# EAGLE board 7seg (EAGLE 9.1.2)
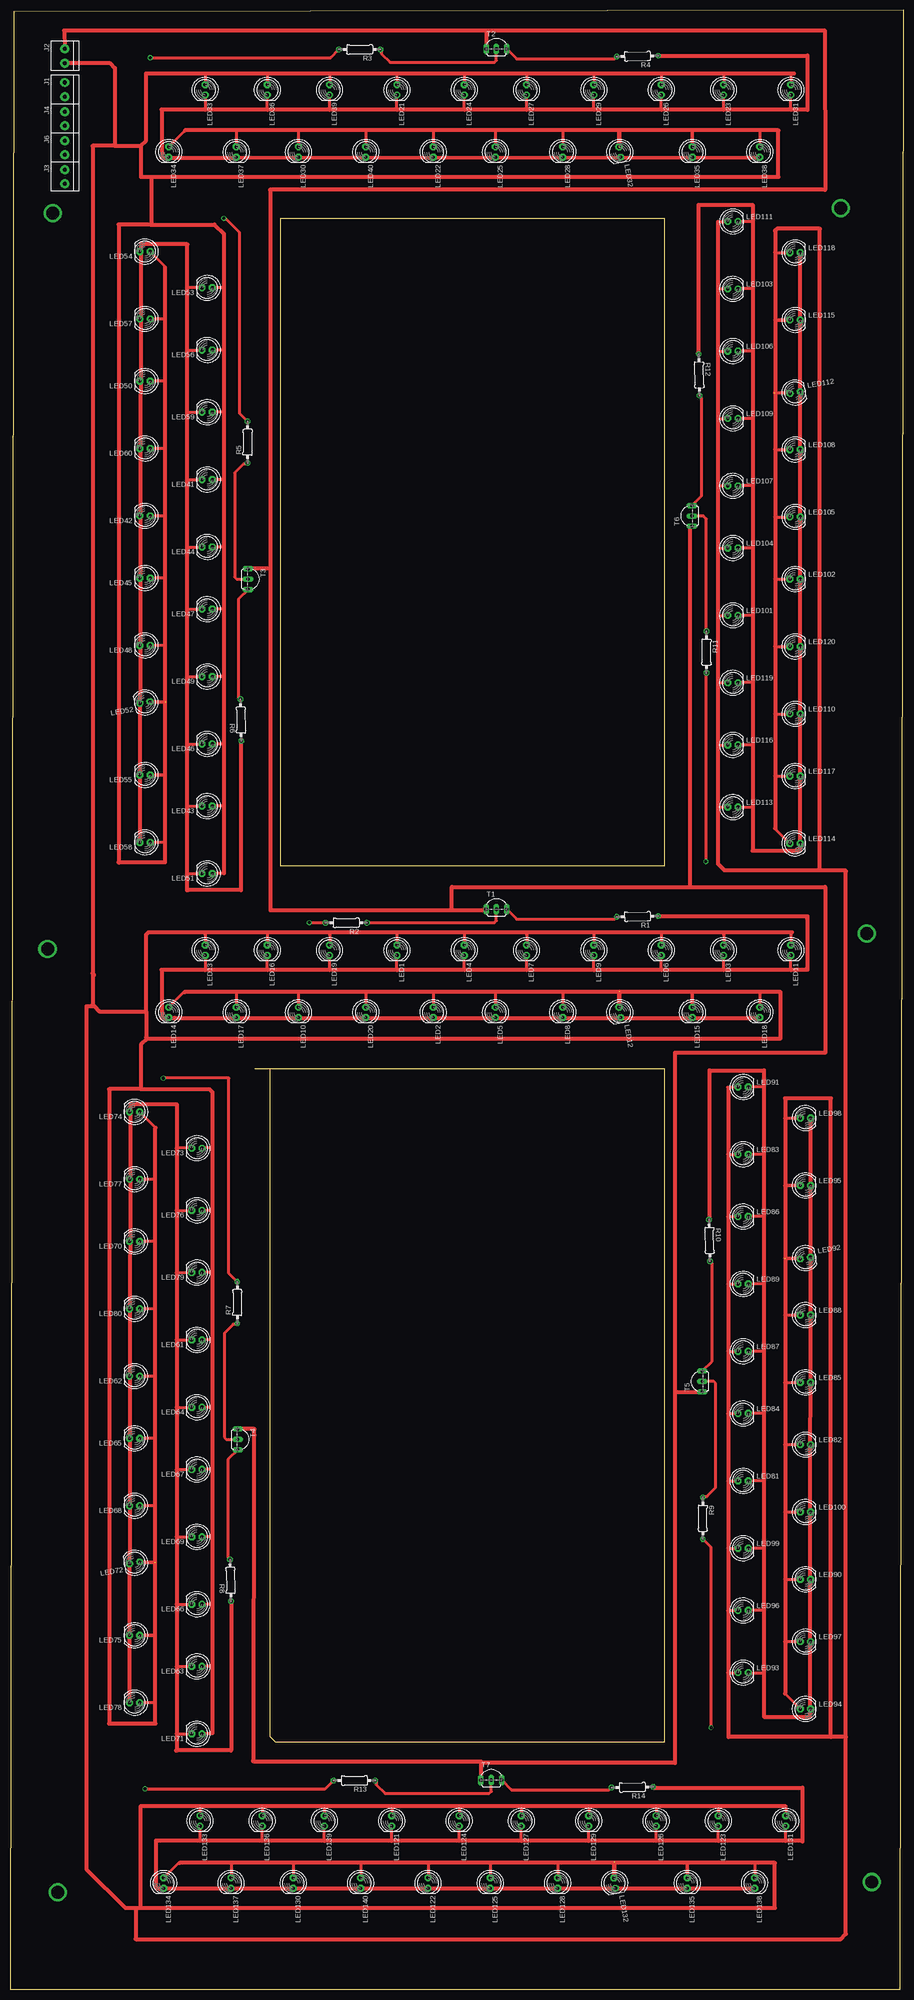
[diagram p0: board, top side]
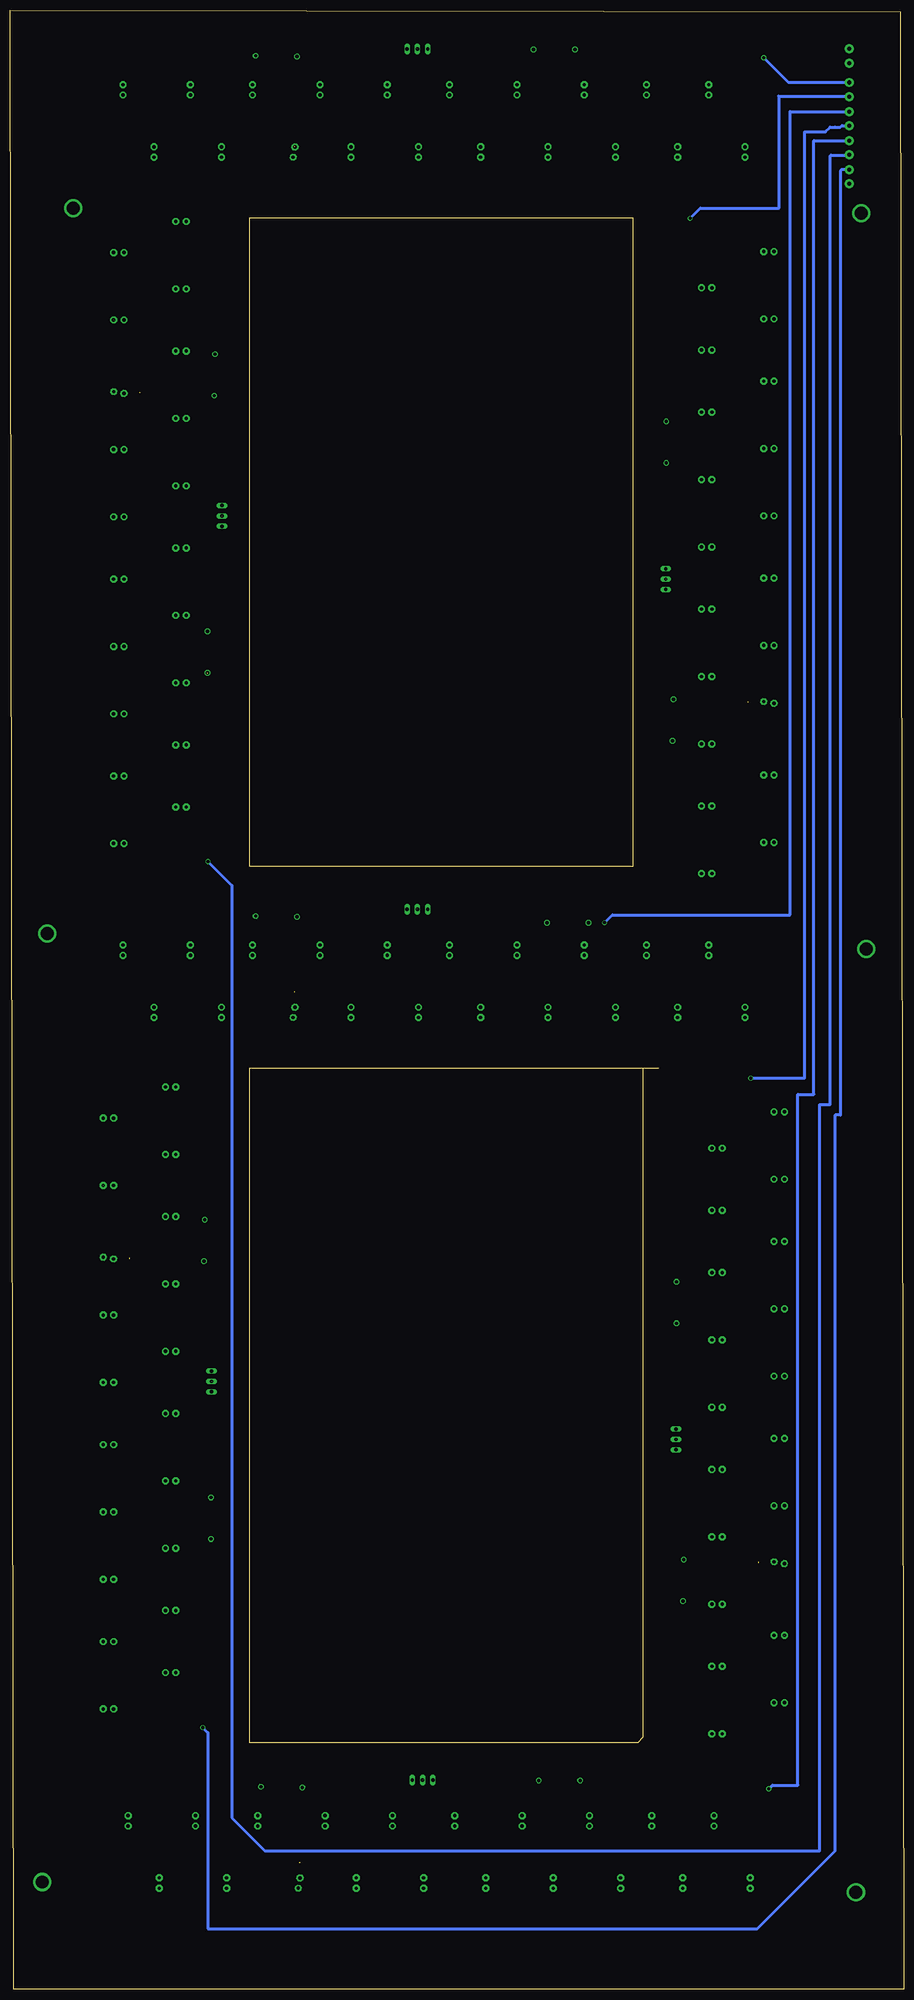
[diagram p1: board, bottom side, seen from below]

Size 218.88 x 484.98 mm. Coordinates in mm from the lower left corner, seen from the top.
Outline: 59.94,225.68 63.75,225.68
Outline: 63.75,225.68 160.27,225.68 160.27,60.58 65.02,60.58 63.75,61.85 63.75,225.68
Outline: 0,0 218,0.04 218.88,484.98 0.89,484.56 0,0
Outline: 66.29,433.96 160.27,433.96 160.27,275.21 66.29,275.21 66.29,433.96
Copper layers (1*16): Top 0.035mm / dielectric 1.5mm / Bottom 0.035mm
Design rules "default": minimum track width 6mil, minimum drill 0.35mm, track to track 6mil, track to pad 6mil, pad to pad 6mil, via to via 6mil, smd to smd 6mil, copper to edge 40mil, drill to drill 6mil, minimum pad ring 10mil, minimum via ring 8mil, stop-mask expansion 4mil, vias tented up to drill 0mil, thermal gap 10mil
Net classes: 0 default: width 0.762 mm, drill 0.762 mm, clearance 0.635 mm; 1 power: width 1.016 mm, drill 0.762 mm, clearance 0.762 mm

## Footprints (pad centres in the part's own frame; a part is rotated, then mirrored left to right if it is on the bottom)
1X2-3.5MM = drill 1 pad 2.184: 1 1.8,0; 2 -1.7,0
LED5MM = drill 0.813 pad 1.676 octagon: A -1.27,0; K 1.27,0
BEAGLEBONEBLACK_MOUNTING_HOLE = drill 3.175 pad 4.445: P$1 0,0
0207/10 = drill 0.813 octagon: 1 -5.08,0; 2 5.08,0
TO92-EBC-OVAL = drill 0.813 long: B 0,-1.27; C 2.54,-1.27; E -2.54,-1.27

## Placement (x,y rotation side)
J1  1X2-3.5MM  [1X2-3.5MM]  13.34,465.46 90 top
J2  1X2-3.5MM  [1X2-3.5MM]  13.34,473.71 90 top
J3  1X2-3.5MM  [1X2-3.5MM]  13.34,444.12 90 top
J4  1X2-3.5MM  [1X2-3.5MM]  13.34,458.34 90 top
J6  1X2-3.5MM  [1X2-3.5MM]  13.34,451.23 90 top
LED1  [LED5MM]  94.74,254.63 270 top
LED2  [LED5MM]  103.63,239.4 270 top
LED3  [LED5MM]  174.75,254.63 270 top
LED4  [LED5MM]  111.25,254.63 270 top
LED5  [LED5MM]  118.87,239.4 270 top
LED6  [LED5MM]  159.51,254.63 270 top
LED7  [LED5MM]  126.49,254.63 270 top
LED8  [LED5MM]  135.38,239.4 270 top
LED9  [LED5MM]  143,254.63 270 top
LED10  [LED5MM]  70.61,239.4 270 top
LED11  [LED5MM]  191.26,254.63 270 top
LED12  [LED5MM]  149.35,239.4 279.7 top
LED13  [LED5MM]  47.75,254.63 270 top
LED14  [LED5MM]  38.86,239.4 270 top
LED15  [LED5MM]  167.13,239.4 270 top
LED16  [LED5MM]  62.99,254.63 270 top
LED17  [LED5MM]  55.37,239.4 270 top
LED18  [LED5MM]  183.64,239.4 270 top
LED19  [LED5MM]  78.23,254.63 270 top
LED20  [LED5MM]  87.12,239.4 270 top
LED21  [LED5MM]  94.74,465.46 270 top
LED22  [LED5MM]  103.63,450.22 270 top
LED23  [LED5MM]  174.75,465.46 270 top
LED24  [LED5MM]  111.25,465.46 270 top
LED25  [LED5MM]  118.87,450.22 270 top
LED26  [LED5MM]  159.51,465.46 270 top
LED27  [LED5MM]  126.49,465.46 270 top
LED28  [LED5MM]  135.38,450.22 270 top
LED29  [LED5MM]  143,465.46 270 top
LED30  [LED5MM]  70.61,450.22 270 top
LED31  [LED5MM]  191.26,465.46 270 top
LED32  [LED5MM]  149.35,450.22 279.7 top
LED33  [LED5MM]  47.75,465.46 270 top
LED34  [LED5MM]  38.86,450.22 270 top
LED35  [LED5MM]  167.13,450.22 270 top
LED36  [LED5MM]  62.99,465.46 270 top
LED37  [LED5MM]  55.37,450.22 270 top
LED38  [LED5MM]  183.64,450.22 270 top
LED39  [LED5MM]  78.23,465.46 270 top
LED40  [LED5MM]  87.12,450.22 270 top
LED41  [LED5MM]  48.26,369.95 180 top
LED42  [LED5MM]  33.02,361.06 180 top
LED43  [LED5MM]  48.26,289.94 180 top
LED44  [LED5MM]  48.26,353.44 180 top
LED45  [LED5MM]  33.02,345.82 180 top
LED46  [LED5MM]  48.26,305.18 180 top
LED47  [LED5MM]  48.26,338.2 180 top
LED48  [LED5MM]  33.02,329.31 180 top
LED49  [LED5MM]  48.26,321.69 180 top
LED50  [LED5MM]  33.02,394.08 180 top
LED51  [LED5MM]  48.26,273.43 180 top
LED52  [LED5MM]  33.02,315.34 189.7 top
LED53  [LED5MM]  48.26,416.94 180 top
LED54  [LED5MM]  33.02,425.83 180 top
LED55  [LED5MM]  33.02,297.56 180 top
LED56  [LED5MM]  48.26,401.7 180 top
LED57  [LED5MM]  33.02,409.32 180 top
LED58  [LED5MM]  33.02,281.05 180 top
LED59  [LED5MM]  48.26,386.46 180 top
LED60  [LED5MM]  33.02,377.57 180 top
LED61  [LED5MM]  45.72,159.13 180 top
LED62  [LED5MM]  30.48,150.24 180 top
LED63  [LED5MM]  45.72,79.12 180 top
LED64  [LED5MM]  45.72,142.62 180 top
LED65  [LED5MM]  30.48,135 180 top
LED66  [LED5MM]  45.72,94.36 180 top
LED67  [LED5MM]  45.72,127.38 180 top
LED68  [LED5MM]  30.48,118.49 180 top
LED69  [LED5MM]  45.72,110.87 180 top
LED70  [LED5MM]  30.48,183.26 180 top
LED71  [LED5MM]  45.72,62.61 180 top
LED72  [LED5MM]  30.48,104.52 189.7 top
LED73  [LED5MM]  45.72,206.12 180 top
LED74  [LED5MM]  30.48,215.01 180 top
LED75  [LED5MM]  30.48,86.74 180 top
LED76  [LED5MM]  45.72,190.88 180 top
LED77  [LED5MM]  30.48,198.5 180 top
LED78  [LED5MM]  30.48,70.23 180 top
LED79  [LED5MM]  45.72,175.64 180 top
LED80  [LED5MM]  30.48,166.75 180 top
LED81  [LED5MM]  179.58,124.59 0 top
LED82  [LED5MM]  194.82,133.48 0 top
LED83  [LED5MM]  179.58,204.6 0 top
LED84  [LED5MM]  179.58,141.1 0 top
LED85  [LED5MM]  194.82,148.72 0 top
LED86  [LED5MM]  179.58,189.36 0 top
LED87  [LED5MM]  179.58,156.34 0 top
LED88  [LED5MM]  194.82,165.23 0 top
LED89  [LED5MM]  179.58,172.85 0 top
LED90  [LED5MM]  194.82,100.46 0 top
LED91  [LED5MM]  179.58,221.11 0 top
LED92  [LED5MM]  194.82,179.2 9.7 top
LED93  [LED5MM]  179.58,77.6 0 top
LED94  [LED5MM]  194.82,68.71 0 top
LED95  [LED5MM]  194.82,196.98 0 top
LED96  [LED5MM]  179.58,92.84 0 top
LED97  [LED5MM]  194.82,85.22 0 top
LED98  [LED5MM]  194.82,213.49 0 top
LED99  [LED5MM]  179.58,108.08 0 top
LED100  [LED5MM]  194.82,116.97 0 top
LED101  [LED5MM]  177.04,336.68 0 top
LED102  [LED5MM]  192.28,345.57 0 top
LED103  [LED5MM]  177.04,416.69 0 top
LED104  [LED5MM]  177.04,353.19 0 top
LED105  [LED5MM]  192.28,360.81 0 top
LED106  [LED5MM]  177.04,401.45 0 top
LED107  [LED5MM]  177.04,368.43 0 top
LED108  [LED5MM]  192.28,377.32 0 top
LED109  [LED5MM]  177.04,384.94 0 top
LED110  [LED5MM]  192.28,312.55 0 top
LED111  [LED5MM]  177.04,433.2 0 top
LED112  [LED5MM]  192.28,391.29 9.7 top
LED113  [LED5MM]  177.04,289.69 0 top
LED114  [LED5MM]  192.28,280.8 0 top
LED115  [LED5MM]  192.28,409.07 0 top
LED116  [LED5MM]  177.04,304.93 0 top
LED117  [LED5MM]  192.28,297.31 0 top
LED118  [LED5MM]  192.28,425.58 0 top
LED119  [LED5MM]  177.04,320.17 0 top
LED120  [LED5MM]  192.28,329.06 0 top
LED121  [LED5MM]  93.47,41.27 270 top
LED122  [LED5MM]  102.36,26.04 270 top
LED123  [LED5MM]  173.48,41.27 270 top
LED124  [LED5MM]  109.98,41.27 270 top
LED125  [LED5MM]  117.6,26.04 270 top
LED126  [LED5MM]  158.24,41.27 270 top
LED127  [LED5MM]  125.22,41.27 270 top
LED128  [LED5MM]  134.11,26.04 270 top
LED129  [LED5MM]  141.73,41.27 270 top
LED130  [LED5MM]  69.34,26.04 270 top
LED131  [LED5MM]  189.99,41.27 270 top
LED132  [LED5MM]  148.08,26.04 279.7 top
LED133  [LED5MM]  46.48,41.27 270 top
LED134  [LED5MM]  37.59,26.04 270 top
LED135  [LED5MM]  165.86,26.04 270 top
LED136  [LED5MM]  61.72,41.27 270 top
LED137  [LED5MM]  54.1,26.04 270 top
LED138  [LED5MM]  182.37,26.04 270 top
LED139  [LED5MM]  76.96,41.27 270 top
LED140  [LED5MM]  85.85,26.04 270 top
MGT2  BEAGLEBONEBLACK_MOUNTING_HOLE  [BEAGLEBONEBLACK_MOUNTING_HOLE]  209.8,258.7 0 top
MGT3  BEAGLEBONEBLACK_MOUNTING_HOLE  [BEAGLEBONEBLACK_MOUNTING_HOLE]  10.41,435.23 0 top
MGT4  BEAGLEBONEBLACK_MOUNTING_HOLE  [BEAGLEBONEBLACK_MOUNTING_HOLE]  203.45,436.5 0 top
MGT6  BEAGLEBONEBLACK_MOUNTING_HOLE  [BEAGLEBONEBLACK_MOUNTING_HOLE]  9.14,254.89 0 top
MGT8  BEAGLEBONEBLACK_MOUNTING_HOLE  [BEAGLEBONEBLACK_MOUNTING_HOLE]  11.68,23.75 0 top
MGT9  BEAGLEBONEBLACK_MOUNTING_HOLE  [BEAGLEBONEBLACK_MOUNTING_HOLE]  211.07,26.29 0 top
R1  [0207/10]  153.67,262.89 181.2 top
R2  [0207/10]  82.3,261.37 180 top
R3  [0207/10]  85.6,475.36 180 top
R4  [0207/10]  153.67,473.71 181.2 top
R5  [0207/10]  58.17,379.1 90 top
R6  [0207/10]  56.52,311.02 91.2 top
R7  [0207/10]  55.63,168.28 90 top
R8  [0207/10]  53.98,100.2 91.2 top
R9  [0207/10]  169.67,115.44 270 top
R10  [0207/10]  171.32,183.51 271.2 top
R11  [0207/10]  170.56,327.66 270 top
R12  [0207/10]  168.78,395.61 271.2 top
R13  [0207/10]  84.33,51.18 180 top
R14  [0207/10]  152.4,49.53 181.2 top
T1  2N2222  [TO92-EBC-OVAL]  119.13,265.94 0 top
T2  2N2222  [TO92-EBC-OVAL]  119.13,476.76 0 top
T3  2N2222  [TO92-EBC-OVAL]  59.56,345.57 270 top
T4  2N2222  [TO92-EBC-OVAL]  57.02,134.75 270 top
T5  2N2222  [TO92-EBC-OVAL]  168.28,148.97 90 top
T6  2N2222  [TO92-EBC-OVAL]  165.74,361.06 90 top
T7  2N2222  [TO92-EBC-OVAL]  117.86,52.58 0 top

## Library data of the parts
J1-J4 J6 LED1-LED140 T1-T7 = adafruit
MGT2-MGT4 MGT6 MGT8 MGT9 = BeagleBone_Black_Wireless
R1-R14 = resistor

## Nets
N$2 [power]: LED17.A
N$3: R1.2 T1.C
N$4: R2.2
N$5: R2.1 T1.B
N$6: T1.E
N$8 [power]: LED34.A
N$9: R4.2 T2.C
N$10: R3.1 T2.B
N$12: R3.2
N$15 [power]: LED54.A
N$16: R6.2 T3.C
N$17: R5.1 T3.B
N$18 [power]: LED55.K
N$19: R5.2
N$22 [power]: LED74.A
N$23: R8.2 T4.C
N$24: R7.1 T4.B
N$25 [power]: LED75.K
N$26: R7.2
N$29 [power]: LED91.A
N$30: R10.2 T5.C
N$31: R9.1 T5.B
N$32 [power]: LED98.K
N$33: R9.2
N$36 [power]: LED111.A
N$37: R12.2 T6.C
N$38: R11.1 T6.B
N$39 [power]: LED118.K
N$40: R11.2
N$43 [power]: LED137.A
N$44: R14.2 T7.C
N$45: R13.1 T7.B
N$47: R13.2
S$1 [power]: LED93.A
S$9 [power]: R14.1
S$10 [power]: LED31.A
S$11 [power]: LED131.A
S$12 [power]: LED33.A
S$13 [power]: LED36.A
S$14 [power]: LED39.A
S$15 [power]: LED21.A
S$16 [power]: LED24.A
S$17 [power]: LED27.A
S$18 [power]: LED29.A
S$19 [power]: LED26.A
S$20 [power]: LED23.A
S$21 [power]: LED38.A
S$22 [power]: LED35.A
S$23 [power]: LED32.A
S$24 [power]: LED28.A
S$25 [power]: LED25.A
S$26 [power]: LED22.A
S$27 [power]: LED40.A
S$28 [power]: LED30.A
S$29 [power]: LED37.A
S$30 [power]: LED43.A
S$31 [power]: LED58.A
S$32 [power]: LED55.A
S$33 [power]: LED52.A
S$34 [power]: LED48.A
S$35 [power]: LED45.A
S$36 [power]: LED42.A
S$37 [power]: LED60.A
S$38 [power]: LED50.A
S$39 [power]: LED57.A
S$40 [power]: LED53.A
S$41 [power]: LED56.A
S$42 [power]: LED59.A
S$43 [power]: LED41.A
S$44 [power]: LED44.A
S$45 [power]: LED47.A
S$46 [power]: LED49.A
S$47 [power]: LED46.A
S$48 [power]: LED51.A
S$49 [power]: LED11.A
S$50 [power]: LED13.A
S$51 [power]: LED16.A
S$52 [power]: LED19.A
S$53 [power]: LED1.A
S$54 [power]: LED4.A
S$55 [power]: LED7.A
S$56 [power]: LED9.A
S$57 [power]: LED6.A
S$58 [power]: LED3.A
S$59 [power]: LED63.A
S$60 [power]: LED18.A
S$61 [power]: LED15.A
S$62 [power]: LED12.A
S$63 [power]: LED8.A
S$64 [power]: LED5.A
S$65 [power]: LED2.A
S$66 [power]: LED20.A
S$67 [power]: LED10.A
S$68 [power]: LED14.A
S$69 [power]: LED73.A
S$70 [power]: LED76.A
S$71 [power]: LED79.A
S$72 [power]: LED61.A
S$73 [power]: LED64.A
S$74 [power]: LED67.A
S$75 [power]: LED69.A
S$76 [power]: LED66.A
S$77 [power]: LED71.A
S$78 [power]: LED78.A
S$79 [power]: LED75.A
S$80 [power]: LED72.A
S$81 [power]: LED68.A
S$82 [power]: LED65.A
S$83 [power]: LED62.A
S$84 [power]: LED80.A
S$85 [power]: LED70.A
S$86 [power]: LED77.A
S$87 [power]: LED138.A
S$88 [power]: LED135.A
S$89 [power]: LED132.A
S$90 [power]: LED128.A
S$91 [power]: LED125.A
S$92 [power]: LED122.A
S$93 [power]: LED140.A
S$94 [power]: LED130.A
S$95 [power]: LED134.A
S$96 [power]: LED133.A
S$97 [power]: LED136.A
S$98 [power]: LED139.A
S$99 [power]: LED121.A
S$100 [power]: LED124.A
S$101 [power]: LED127.A
S$102 [power]: LED129.A
S$103 [power]: LED126.A
S$104 [power]: LED123.A
S$105 [power]: LED97.A
S$106 [power]: LED96.A
S$107 [power]: LED99.A
S$108 [power]: LED81.A
S$109 [power]: LED84.A
S$110 [power]: LED87.A
S$111 [power]: LED89.A
S$112 [power]: LED86.A
S$113 [power]: LED83.A
S$114 [power]: LED98.A
S$115 [power]: LED95.A
S$116 [power]: LED92.A
S$117 [power]: LED88.A
S$118 [power]: LED85.A
S$119 [power]: LED82.A
S$120 [power]: LED100.A
S$121 [power]: LED90.A
S$122 [power]: LED94.A
S$123 [power]: LED117.A
S$124 [power]: LED118.A
S$125 [power]: LED115.A
S$126 [power]: LED112.A
S$127 [power]: LED108.A
S$128 [power]: LED105.A
S$129 [power]: LED102.A
S$130 [power]: LED120.A
S$131 [power]: LED110.A
S$132 [power]: LED114.A
S$133 [power]: LED113.A
S$134 [power]: LED116.A
S$135 [power]: LED119.A
S$136 [power]: LED101.A
S$137 [power]: LED104.A
S$138 [power]: LED107.A
S$139 [power]: LED109.A
S$140 [power]: LED106.A
S$141 [power]: LED103.A
S$142 [power]: T6.E
S$143 [power]: LED31.K
S$144 [power]: LED23.K
S$145 [power]: LED26.K
S$146 [power]: LED29.K
S$147 [power]: LED27.K
S$148 [power]: LED24.K
S$149 [power]: LED21.K
S$150 [power]: LED39.K
S$151 [power]: LED36.K
S$152 [power]: LED33.K
S$153 [power]: LED32.K
S$154 [power]: LED35.K
S$155 [power]: LED51.K
S$156 [power]: LED43.K
S$157 [power]: LED46.K
S$158 [power]: LED49.K
S$159 [power]: LED47.K
S$160 [power]: LED44.K
S$161 [power]: LED41.K
S$162 [power]: LED59.K
S$163 [power]: LED56.K
S$164 [power]: LED53.K
S$165 [power]: LED11.K
S$166 [power]: LED52.K
S$167 [power]: LED3.K
S$168 [power]: LED6.K
S$169 [power]: LED9.K
S$170 [power]: LED7.K
S$171 [power]: LED4.K
S$172 [power]: LED1.K
S$173 [power]: LED19.K
S$174 [power]: LED16.K
S$175 [power]: LED13.K
S$176 [power]: LED12.K
S$177 [power]: LED15.K
S$178 [power]: LED71.K
S$179 [power]: LED63.K
S$180 [power]: LED66.K
S$181 [power]: LED69.K
S$182 [power]: LED67.K
S$183 [power]: LED64.K
S$184 [power]: LED61.K
S$185 [power]: LED79.K
S$186 [power]: LED76.K
S$187 [power]: LED73.K
S$188 [power]: LED72.K
S$189 [power]: R10.1
S$190 [power]: LED131.K
S$191 [power]: LED123.K
S$192 [power]: LED126.K
S$193 [power]: LED129.K
S$194 [power]: LED127.K
S$195 [power]: LED124.K
S$196 [power]: LED121.K
S$197 [power]: LED139.K
S$198 [power]: LED136.K
S$199 [power]: LED133.K
S$200 [power]: LED132.K
S$201 [power]: LED135.K
S$202 [power]: R12.1
S$203 [power]: LED91.K
S$204 [power]: LED83.K
S$205 [power]: LED86.K
S$206 [power]: LED89.K
S$207 [power]: LED87.K
S$208 [power]: LED84.K
S$209 [power]: LED81.K
S$210 [power]: LED99.K
S$211 [power]: LED96.K
S$212 [power]: LED93.K
S$213 [power]: LED92.K
S$214 [power]: LED95.K
S$216 [power]: LED111.K
S$217 [power]: LED103.K
S$218 [power]: LED106.K
S$219 [power]: LED109.K
S$220 [power]: LED107.K
S$221 [power]: LED104.K
S$222 [power]: LED101.K
S$223 [power]: LED119.K
S$224 [power]: LED116.K
S$225 [power]: LED113.K
S$227 [power]: LED112.K
S$228 [power]: LED115.K

## Tracks (layer width: path | path; a pad name or v marks a point on that pad's centre or on a via)
GND
  Top 1.016: 13.34,475.62 13.21,480.06 115.82,480.06 | 115.82,480.06 116.59,480.06 116.59,475.49 | 115.82,480.06 199.52,480.06 199.64,440.94 63.75,440.94 | 63.75,440.94 63.63,440.94 | 63.75,440.94 63.75,348.87 63.75,348.11 | 63.75,348.11 58.42,348.11 | 63.75,348.11 63.75,264.41 108.2,264.41 | 108.2,264.41 116.59,264.41 | 108.2,264.41 108.2,270.13 166.62,270.13 | 166.62,270.13 166.62,358.39 | 166.62,270.13 199.64,270.13 199.64,229.49 162.81,229.49 162.81,146.94 162.81,146.43 | 162.81,146.43 169.42,146.43 | 162.81,146.43 162.81,58.04 | 162.81,58.04 | 162.81,58.04 162.81,55.5 115.82,55.5 115.32,55.5 | 59.72,55.75 59.44,56.01 | 115.32,55.5 115.32,55.75 59.72,55.75 | 115.32,55.5 115.32,51.31 | 59.72,55.75 59.82,135.76 59.82,137.29 55.75,137.29
GND1
  Top 1.016: 159,473.84 195.33,473.84 195.33,460.63 | 195.33,460.63 195.33,460.5 | 195.33,460.63 37.08,460.63 37.08,448.82 54.86,448.82 | 54.86,448.82 55.63,448.82 | 54.86,448.82 183.52,448.95
GND2
  Top 1.016: 56.52,305.94 56.52,269.37 43.43,269.37 | 43.43,269.37 43.31,269.37 | 43.43,269.37 43.43,427.61 32,427.61 31.75,281.18
GND3
  Top 1.016: 195.2,262.51 195.2,262.89 | 195.33,262.51 195.33,262.89 | 195.33,262.89 195.2,262.89 | 195.33,262.89 | 195.33,262.89 195.33,249.81 195.07,249.81 | 195.07,250.06 195.07,249.81 | 38.37,238.05 37.08,238 37.08,249.81 195.07,249.81 | 38.37,238.05 40.26,238.12 | 38.37,238.05 183.77,238 | 195.2,262.89 158.88,262.89
GND4
  Top 1.016: 54.1,94.87 54.1,58.55 40.89,58.55 | 40.89,58.55 40.64,58.55 | 40.89,58.55 40.89,216.79 29.46,216.79 29.21,70.36
GND5
  Top 1.016: 157.68,49.4 194.06,49.4 194.06,36.45 | 194.06,36.45 194.06,36.2 | 194.06,36.45 35.69,36.45 35.69,24.77 182.5,24.77 | 182.5,24.77 182.63,24.77 182.5,24.77
GND6
  Top 1.016: 171.32,188.72 171.32,225.17 184.66,225.17 184.66,66.8 195.96,66.8 196.09,213.49
GND7
  Top 1.016: 168.66,400.94 168.66,437.26 181.86,437.26 181.86,279.02 193.55,279.02 193.55,425.45
N$2
  Top 0.762: 55.37,244.47 LED17.A
N$3
  Top 0.762: T1.C 124.08,262.26 148.06,262.26 R1.2
N$4
  Top 0.762: 73.15,261.37 R2.2
N$5  (1 unrouted)
  Top 0.762: R2.1 93.09,261.37 118.62,261.37 119.13,261.87 T1.B
N$6
  Top 0.762: T1.E 116.2,265.05
N$8
  Top 0.762: LED34.A 42.67,455.3
N$9
  Top 0.762: T2.C 124.08,473.08 148.06,473.08 R4.2
N$10  (1 unrouted)
  Top 0.762: R3.1 90.93,475.11 90.93,474.35 93.09,472.19 118.62,472.19 119.13,472.69 T2.B
N$12
  Top 0.762: 34.14,473.33 78.49,473.33 R3.2
N$15
  Top 0.762: LED54.A 38.1,422.02
N$16
  Top 0.762: T3.C 55.88,340.61 55.88,316.63 R6.2
N$17  (1 unrouted)
  Top 0.762: R5.1 57.91,373.76 57.15,373.76 54.99,371.6 54.99,346.08 55.5,345.57 T3.B
N$18
  Top 0.762: 31.77,297.58 LED55.K
N$19
  Top 0.762: R5.2 56.13,386.21 56.13,430.55 52.6,434.09 52.2,434.09
N$22
  Top 0.762: LED74.A 35.56,211.2
N$23
  Top 0.762: T4.C 53.34,129.79 53.34,105.81 R8.2
N$24  (1 unrouted)
  Top 0.762: R7.1 55.37,162.94 54.61,162.94 52.45,160.78 52.45,135.25 52.96,134.75 T4.B
N$25  (1 unrouted)
  Top 0.762: 29.23,86.76 LED75.K
N$26
  Top 0.762: R7.2 53.59,175.39 53.59,223.27 37.47,223.27 | 37.47,223.27
N$29
  Top 0.762: 175.77,221.11 LED91.A
N$30
  Top 0.762: T5.C 171.96,153.92 171.96,177.91 R10.2
N$31  (1 unrouted)
  Top 0.762: R9.1 169.93,120.78 170.69,120.78 172.85,122.94 172.85,148.46 172.34,148.97 T5.B
N$33
  Top 0.762: 171.7,63.99 171.7,108.33 R9.2
N$36
  Top 0.762: 173.23,433.2 LED111.A
N$37
  Top 0.762: T6.C 169.42,366.01 169.42,390 R12.2
N$38  (1 unrouted)
  Top 0.762: R11.1 170.56,360.3 169.8,361.06 T6.B
N$40  (1 unrouted)
  Top 0.762: 170.43,322.45 170.43,276.12
N$43
  Top 0.762: 54.1,31.11 LED137.A
N$44
  Top 0.762: T7.C 122.81,48.9 146.79,48.9 R14.2
N$45  (1 unrouted)
  Top 0.762: R13.1 89.66,50.93 89.66,50.16 91.82,48.01 117.35,48.01 117.86,48.51 T7.B
N$47
  Top 0.762: 32.87,49.15 77.22,49.15 R13.2
S$1
  Top 0.762: 175.77,77.6 LED93.A
S$2  (via drill 0.76)
  Bottom 0.762: v34.29,473.33 28.32,467.36 13.34,467.36
S$3  (via drill 0.76)
  Bottom 0.762: v37.47,223.27 24.26,223.27 24.26,455.17 19.18,455.17 18.03,456.31 | 18.03,456.31 16.76,456.31 | 16.76,456.31 15.49,456.31 | 13.34,456.69 15.11,456.69 15.49,456.31 | 16.76,456.31 | 16.76,456.31 | 18.03,456.31 15.49,456.31
S$4  (via drill 0.76)
  Bottom 0.762: 13.34,449.45 17.78,449.45 18.03,449.2 18.03,216.79 20.57,216.79 20.57,33.91 156.46,33.91 164.59,42.04 164.59,270.51 v170.43,276.35
S$5  (via drill 0.76)
  Bottom 0.762: v52.32,433.96 49.78,436.5 30.48,436.5 30.48,463.8 30.61,463.93 13.08,463.93
S$6  (via drill 0.76)
  Bottom 0.762: 13.46,445.9 15.24,445.9 15.49,445.64 15.49,214.25 16.76,214.25 16.76,33.91 35.81,14.86 170.43,14.86 170.43,62.87 v171.7,64.14
S$7  (via drill 0.76)
  Bottom 0.762: 13.34,453.01 21.97,453.01 21.97,219.33 25.91,219.33 25.91,50.04 32.13,50.04 v33.02,49.15
S$8  (via drill 0.76)
  Bottom 0.762: 13.59,460.12 27.81,460.12 27.81,263.27 71.37,263.27 v73.28,261.37
S$10
  Top 0.762: 191.26,469.27 LED31.A
S$11
  Top 0.762: 189.99,45.09 LED131.A
S$12
  Top 0.762: 47.75,469.27 LED33.A
S$13
  Top 0.762: 62.99,469.27 LED36.A
S$14
  Top 0.762: 78.23,469.27 LED39.A
S$15
  Top 0.762: 94.74,469.27 LED21.A
S$16
  Top 0.762: 111.25,469.27 LED24.A
S$17
  Top 0.762: 126.49,469.27 LED27.A
S$18
  Top 0.762: 143,469.27 LED29.A
S$19
  Top 0.762: 159.51,469.27 LED26.A
S$20
  Top 0.762: 174.75,469.27 LED23.A
S$21
  Top 0.762: 183.64,455.3 LED38.A
S$22
  Top 0.762: 167.15,455.28 167.13,455.26 LED35.A 167.13,455.3
S$23  (1 unrouted)
  Top 0.762: 149.35,455.3 149.35,451.49 | LED32.A 149.14,455.28
S$24
  Top 0.762: 135.38,455.3 LED28.A
S$25
  Top 0.762: 118.87,455.3 LED25.A
S$26
  Top 0.762: 103.63,455.3 LED22.A
S$27
  Top 0.762: 87.12,455.3 LED40.A
S$28
  Top 0.762: 70.61,455.3 LED30.A
S$29
  Top 0.762: 55.37,455.3 LED37.A
S$30
  Top 0.762: 52.07,289.94 LED43.A
S$31
  Top 0.762: 38.1,281.05 LED58.A
S$32
  Top 0.762: 38.08,297.54 38.06,297.56 LED55.A 38.1,297.56
S$33  (1 unrouted)
  Top 0.762: LED52.A 38.08,315.56 | 38.1,315.34 34.29,315.34
S$34
  Top 0.762: 38.1,329.31 LED48.A
S$35
  Top 0.762: 38.1,345.82 LED45.A
S$36
  Top 0.762: 38.1,361.06 LED42.A
S$37
  Top 0.762: 38.1,377.57 LED60.A
S$38
  Top 0.762: 38.1,394.08 LED50.A
S$39
  Top 0.762: 38.1,409.32 LED57.A
S$40
  Top 0.762: 52.07,416.94 LED53.A
S$41
  Top 0.762: 52.07,401.7 LED56.A
S$42
  Top 0.762: 52.07,386.46 LED59.A
S$43
  Top 0.762: 52.07,369.95 LED41.A
S$44
  Top 0.762: 52.07,353.44 LED44.A
S$45
  Top 0.762: 52.07,338.2 LED47.A
S$46
  Top 0.762: 52.07,321.69 LED49.A
S$47
  Top 0.762: 52.07,305.18 LED46.A
S$48
  Top 0.762: 52.07,273.43 LED51.A
S$49
  Top 0.762: 191.26,258.45 LED11.A
S$50
  Top 0.762: 47.75,258.45 LED13.A
S$51
  Top 0.762: 62.99,258.45 LED16.A
S$52
  Top 0.762: 78.23,258.45 LED19.A
S$53
  Top 0.762: 94.74,258.45 LED1.A
S$54
  Top 0.762: 111.25,258.45 LED4.A
S$55
  Top 0.762: 126.49,258.45 LED7.A
S$56
  Top 0.762: 143,258.45 LED9.A
S$57
  Top 0.762: 159.51,258.45 LED6.A
S$58
  Top 0.762: 174.75,258.45 LED3.A
S$59
  Top 0.762: 49.53,79.12 LED63.A
S$60
  Top 0.762: 183.64,244.47 LED18.A
S$61
  Top 0.762: 167.15,244.46 167.13,244.44 LED15.A 167.13,244.47
S$62  (1 unrouted)
  Top 0.762: LED12.A 149.14,244.46 | 149.35,244.47 149.35,240.66
S$63
  Top 0.762: 135.38,244.47 LED8.A
S$64
  Top 0.762: 118.87,244.47 LED5.A
S$65
  Top 0.762: 103.63,244.47 LED2.A
S$66
  Top 0.762: 87.12,244.47 LED20.A
S$67
  Top 0.762: 70.61,244.47 LED10.A
S$68
  Top 0.762: LED14.A 42.67,244.47
S$69
  Top 0.762: 49.53,206.12 LED73.A
S$70
  Top 0.762: 49.53,190.88 LED76.A
S$71
  Top 0.762: 49.53,175.64 LED79.A
S$72
  Top 0.762: 49.53,159.13 LED61.A
S$73
  Top 0.762: 49.53,142.62 LED64.A
S$74
  Top 0.762: 49.53,127.38 LED67.A
S$75
  Top 0.762: 49.53,110.87 LED69.A
S$76
  Top 0.762: 49.53,94.36 LED66.A
S$77
  Top 0.762: 49.53,62.61 LED71.A
S$78
  Top 0.762: 35.56,70.23 LED78.A
S$79
  Top 0.762: 35.54,86.72 35.52,86.74 LED75.A 35.56,86.74
S$80  (1 unrouted)
  Top 0.762: LED72.A 35.54,104.73 | 35.56,104.52 31.75,104.52
S$81
  Top 0.762: 35.56,118.49 LED68.A
S$82
  Top 0.762: 35.56,135 LED65.A
S$83
  Top 0.762: 35.56,150.24 LED62.A
S$84
  Top 0.762: 35.56,166.75 LED80.A
S$85
  Top 0.762: 35.56,183.26 LED70.A
S$86
  Top 0.762: 35.56,198.5 LED77.A
S$87
  Top 0.762: 182.37,31.11 LED138.A
S$88
  Top 0.762: 165.88,31.1 165.86,31.08 LED135.A 165.86,31.11
S$89  (1 unrouted)
  Top 0.762: LED132.A 147.87,31.1 | 148.08,31.11 148.08,27.3
S$90
  Top 0.762: 134.11,31.11 LED128.A
S$91
  Top 0.762: 117.6,31.11 LED125.A
S$92
  Top 0.762: 102.36,31.11 LED122.A
S$93
  Top 0.762: 85.85,31.11 LED140.A
S$94
  Top 0.762: 69.34,31.11 LED130.A
S$95
  Top 0.762: LED134.A 41.4,31.11
S$96
  Top 0.762: 46.48,45.09 LED133.A
S$97
  Top 0.762: 61.72,45.09 LED136.A
S$98
  Top 0.762: 76.96,45.09 LED139.A
S$99
  Top 0.762: 93.47,45.09 LED121.A
S$100
  Top 0.762: 109.98,45.09 LED124.A
S$101
  Top 0.762: 125.22,45.09 LED127.A
S$102
  Top 0.762: 141.73,45.09 LED129.A
S$103
  Top 0.762: 158.24,45.09 LED126.A
S$104
  Top 0.762: 173.48,45.09 LED123.A
S$105
  Top 0.762: 189.74,85.22 LED97.A
S$106
  Top 0.762: 175.77,92.84 LED96.A
S$107
  Top 0.762: 175.77,108.08 LED99.A
S$108
  Top 0.762: 175.77,124.59 LED81.A
S$109
  Top 0.762: 175.77,141.1 LED84.A
S$110
  Top 0.762: 175.77,156.34 LED87.A
S$111
  Top 0.762: 175.77,172.85 LED89.A
S$112
  Top 0.762: 175.77,189.36 LED86.A
S$113
  Top 0.762: 175.77,204.6 LED83.A
S$114
  Top 0.762: 189.74,213.49 LED98.A
S$115
  Top 0.762: 189.74,196.98 LED95.A 189.77,196.98 189.76,197
S$116  (1 unrouted)
  Top 0.762: LED92.A 189.76,178.98 | 189.74,179.2 193.55,179.2
S$117
  Top 0.762: 189.74,165.23 LED88.A
S$118
  Top 0.762: 189.74,148.72 LED85.A
S$119
  Top 0.762: 189.74,133.48 LED82.A
S$120
  Top 0.762: 189.74,116.97 LED100.A
S$121
  Top 0.762: 189.74,100.46 LED90.A
S$122
  Top 0.762: LED94.A 189.74,72.52
S$123
  Top 0.762: 187.2,297.31 LED117.A
S$124
  Top 0.762: 187.2,425.58 LED118.A
S$125
  Top 0.762: 187.2,409.07 LED115.A 187.23,409.07 187.22,409.09
S$126  (1 unrouted)
  Top 0.762: LED112.A 187.22,391.07 | 187.2,391.29 191.01,391.29
S$127
  Top 0.762: 187.2,377.32 LED108.A
S$128
  Top 0.762: 187.2,360.81 LED105.A
S$129
  Top 0.762: 187.2,345.57 LED102.A
S$130
  Top 0.762: 187.2,329.06 LED120.A
S$131
  Top 0.762: 187.2,312.55 LED110.A
S$132
  Top 0.762: LED114.A 187.2,284.61
S$133
  Top 0.762: 173.23,289.69 LED113.A
S$134
  Top 0.762: 173.23,304.93 LED116.A
S$135
  Top 0.762: 173.23,320.17 LED119.A
S$136
  Top 0.762: 173.23,336.68 LED101.A
S$137
  Top 0.762: 173.23,353.19 LED104.A
S$138
  Top 0.762: 173.23,368.43 LED107.A
S$139
  Top 0.762: 173.23,384.94 LED109.A
S$140
  Top 0.762: 173.23,401.45 LED106.A
S$141
  Top 0.762: 173.23,416.69 LED103.A
S$142
  Top 0.762: T6.E 166.62,358.14
S$143
  Top 0.762: 191.26,460.38 LED31.K
S$144
  Top 0.762: 174.75,460.38 LED23.K
S$145
  Top 0.762: 159.51,460.38 LED26.K
S$146
  Top 0.762: 143,460.38 LED29.K
S$147
  Top 0.762: 126.49,460.38 LED27.K
S$148
  Top 0.762: 111.25,460.38 LED24.K
S$149
  Top 0.762: 94.74,460.38 LED21.K
S$150
  Top 0.762: 78.23,460.38 LED39.K
S$151
  Top 0.762: 62.99,460.38 LED36.K
S$152
  Top 0.762: LED33.K 47.75,460.63 47.75,460.38
S$153
  Top 0.762: 149.55,448.95 LED32.K
S$154
  Top 0.762: 167.11,448.96 LED35.K
S$155
  Top 0.762: 43.18,273.43 LED51.K
S$156
  Top 0.762: 43.18,289.94 LED43.K
S$157
  Top 0.762: 43.18,305.18 LED46.K
S$158
  Top 0.762: 43.18,321.69 LED49.K
S$159
  Top 0.762: 43.18,338.2 LED47.K
S$160
  Top 0.762: 43.18,353.44 LED44.K
S$161
  Top 0.762: 43.18,369.95 LED41.K
S$162
  Top 0.762: 43.18,386.46 LED59.K
S$163
  Top 0.762: 43.18,401.7 LED56.K
S$164
  Top 0.762: LED53.K 43.43,416.94 43.18,416.94
S$165
  Top 0.762: 191.26,249.56 LED11.K
S$166
  Top 0.762: 31.75,315.15 LED52.K
S$167
  Top 0.762: 174.75,249.56 LED3.K
S$168
  Top 0.762: 159.51,249.56 LED6.K
S$169
  Top 0.762: 143,249.56 LED9.K
S$170
  Top 0.762: 126.49,249.56 LED7.K
S$171
  Top 0.762: 111.25,249.56 LED4.K
S$172
  Top 0.762: 94.74,249.56 LED1.K
S$173
  Top 0.762: 78.23,249.56 LED19.K
S$174
  Top 0.762: 62.99,249.56 LED16.K
S$175
  Top 0.762: LED13.K 47.75,249.81 47.75,249.56
S$176
  Top 0.762: 149.55,238.12 LED12.K
S$177
  Top 0.762: 167.11,238.14 LED15.K
S$178
  Top 0.762: 40.64,62.61 LED71.K
S$179
  Top 0.762: 40.64,79.12 LED63.K
S$180
  Top 0.762: 40.64,94.36 LED66.K
S$181
  Top 0.762: 40.64,110.87 LED69.K
S$182
  Top 0.762: 40.64,127.38 LED67.K
S$183
  Top 0.762: 40.64,142.62 LED64.K
S$184
  Top 0.762: 40.64,159.13 LED61.K
S$185
  Top 0.762: 40.64,175.64 LED79.K
S$186
  Top 0.762: 40.64,190.88 LED76.K
S$187
  Top 0.762: LED73.K 40.89,206.12 40.64,206.12
S$188
  Top 0.762: 29.21,104.33 LED72.K
S$190
  Top 0.762: 189.99,36.2 LED131.K
S$191
  Top 0.762: 173.48,36.2 LED123.K
S$192
  Top 0.762: 158.24,36.2 LED126.K
S$193
  Top 0.762: 141.73,36.2 LED129.K
S$194
  Top 0.762: 125.22,36.2 LED127.K
S$195
  Top 0.762: 109.98,36.2 LED124.K
S$196
  Top 0.762: 93.47,36.2 LED121.K
S$197
  Top 0.762: 76.96,36.2 LED139.K
S$198
  Top 0.762: 61.72,36.2 LED136.K
S$199
  Top 0.762: LED133.K 46.48,36.45 46.48,36.2
S$200
  Top 0.762: 148.28,24.77 LED132.K
S$201
  Top 0.762: 165.84,24.78 LED135.K
S$203
  Top 0.762: 184.66,221.11 LED91.K
S$204
  Top 0.762: 184.66,204.6 LED83.K
S$205
  Top 0.762: 184.66,189.36 LED86.K
S$206
  Top 0.762: 184.66,172.85 LED89.K
S$207
  Top 0.762: 184.66,156.34 LED87.K
S$208
  Top 0.762: 184.66,141.1 LED84.K
S$209
  Top 0.762: 184.66,124.59 LED81.K
S$210
  Top 0.762: 184.66,108.08 LED99.K
S$211
  Top 0.762: 184.66,92.84 LED96.K
S$212
  Top 0.762: 184.66,77.6 184.4,77.6 LED93.K
S$213
  Top 0.762: 196.09,179.39 LED92.K
S$214  (1 unrouted)
  Top 0.762: 196.07,196.96 LED95.K
S$216
  Top 0.762: 182.12,433.2 LED111.K
S$217
  Top 0.762: 182.12,416.69 LED103.K
S$218
  Top 0.762: 182.12,401.45 LED106.K
S$219
  Top 0.762: 182.12,384.94 LED109.K
S$220
  Top 0.762: 182.12,368.43 LED107.K
S$221
  Top 0.762: 182.12,353.19 LED104.K
S$222
  Top 0.762: 182.12,336.68 LED101.K
S$223
  Top 0.762: 182.12,320.17 LED119.K
S$224
  Top 0.762: 182.12,304.93 LED116.K
S$225
  Top 0.762: 182.12,289.69 181.86,289.69 LED113.K
S$227
  Top 0.762: 193.55,391.48 LED112.K
S$228  (1 unrouted)
  Top 0.762: 193.53,409.05 LED115.K
VCC
  Top 1.016: 13.34,472.06 24.38,472.06 25.65,470.79 25.65,451.74 | 25.65,451.74 20.19,451.74 20.19,248.92 | 25.65,451.74 32,451.74 | 20.19,248.92 20.57,248.54 | 20.19,248.92 20.19,241.3 20.57,240.92 | 20.57,240.92 21.84,239.65 33.27,239.65 | 20.57,240.92 18.67,240.92 18.67,29.46 28.19,19.94 30.73,19.94 | 30.73,19.94 30.73,12.32 203.45,12.32 204.72,13.59 204.72,61.85 | 204.72,61.85 201.04,61.85 | 198.37,274.19 204.47,274.19 204.72,273.94 204.72,61.85 | 32,451.74 32,444.12 34.54,444.12 | 32,451.74 33.27,453.01 33.27,469.52 192.02,469.52 | 34.54,444.12 188.21,444.12 188.21,455.55 42.8,455.55 | 34.54,444.12 34.54,432.69 34.29,432.44 | 34.29,432.44 26.54,432.44 26.54,276.23 | 26.54,276.23 26.67,276.1 | 26.54,276.23 37.97,276.23 37.97,421.89 | 34.29,432.44 50.04,432.44 52.32,430.15 52.32,273.43 | 33.27,239.65 33.27,233.3 33.53,233.04 | 33.27,239.65 33.27,258.45 33.91,259.08 191.52,259.08 | 33.53,233.04 188.72,233.04 188.72,244.35 42.67,244.35 | 33.53,233.04 32,231.52 32,220.6 | 32,220.6 48.77,220.6 49.53,219.84 49.53,62.74 | 32,220.6 24.26,220.6 24.26,65.15 35.56,65.15 35.56,211.07 | 30.73,19.94 32,19.94 | 32,19.94 187.33,19.94 187.33,30.99 41.53,30.99 | 32,19.94 32,44.96 189.87,44.96 | 201.04,61.85 201.04,218.31 189.87,218.31 189.87,72.52 | 201.04,61.85 176.02,61.85 176.02,220.98 | 198.37,274.19 175.01,274.19 173.36,275.84 173.36,433.07 | 187.39,430.98 187.83,431.42 198.37,431.42 198.37,274.19 | 187.39,430.98 187.33,430.91 | 187.39,430.98 187.39,284.54 187.45,284.48